# Altium PCB USB ISO.PcbDoc
Units mil, origin at the board's own origin, x right, y up, seen from the top; angles counter-clockwise.
Board outline 760 x 975 mil, 2 copper layers (Top Layer, Bottom Layer); 9 components, 27 nets, 54 pads, 12 vias.
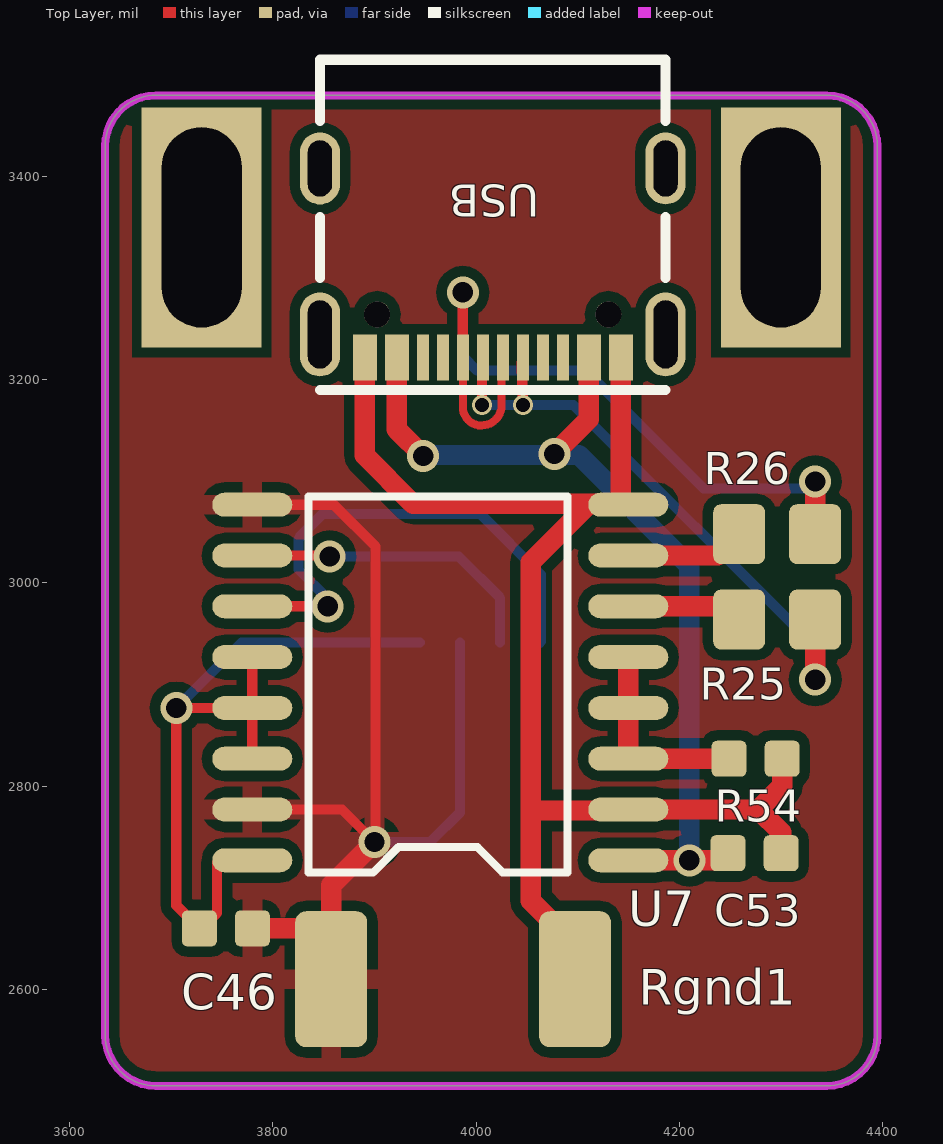
[diagram p0: Top Layer view]
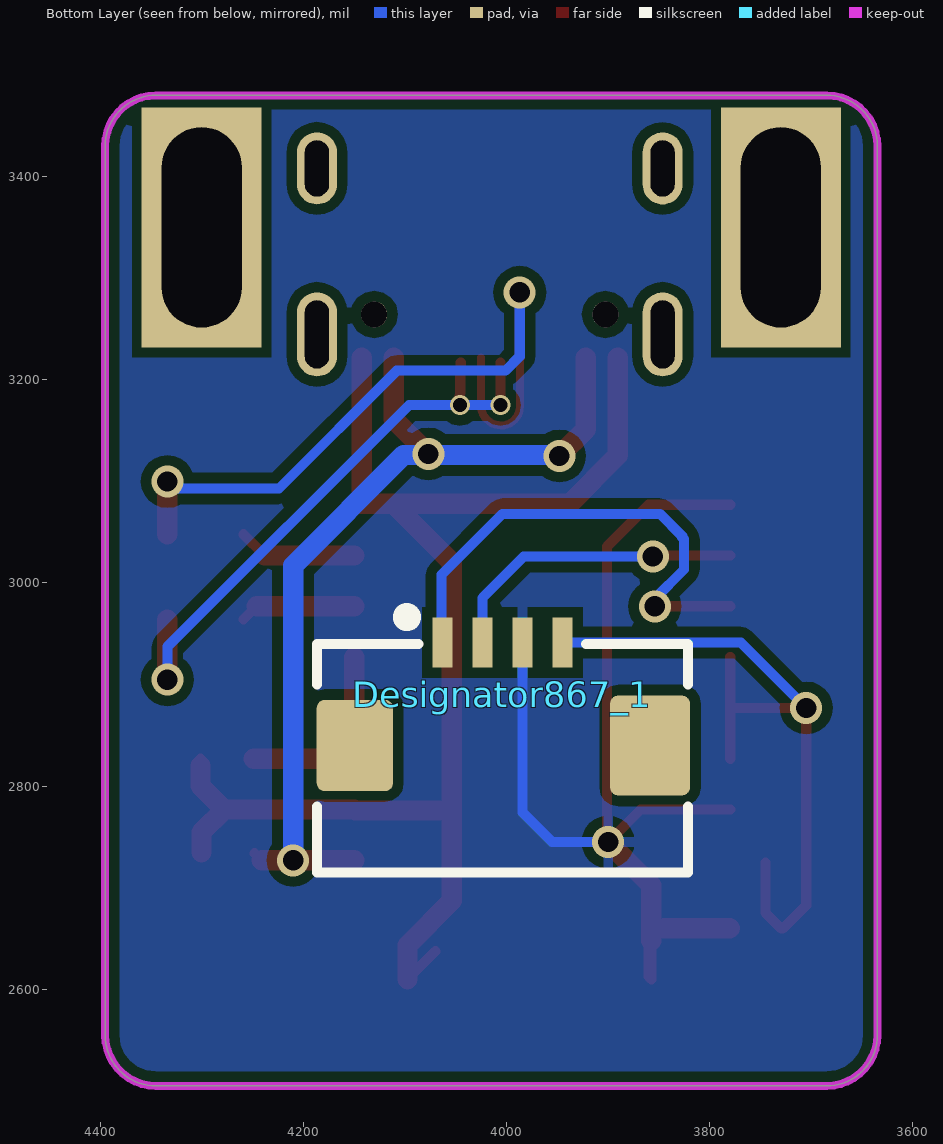
[diagram p1: Bottom Layer view, seen from below]
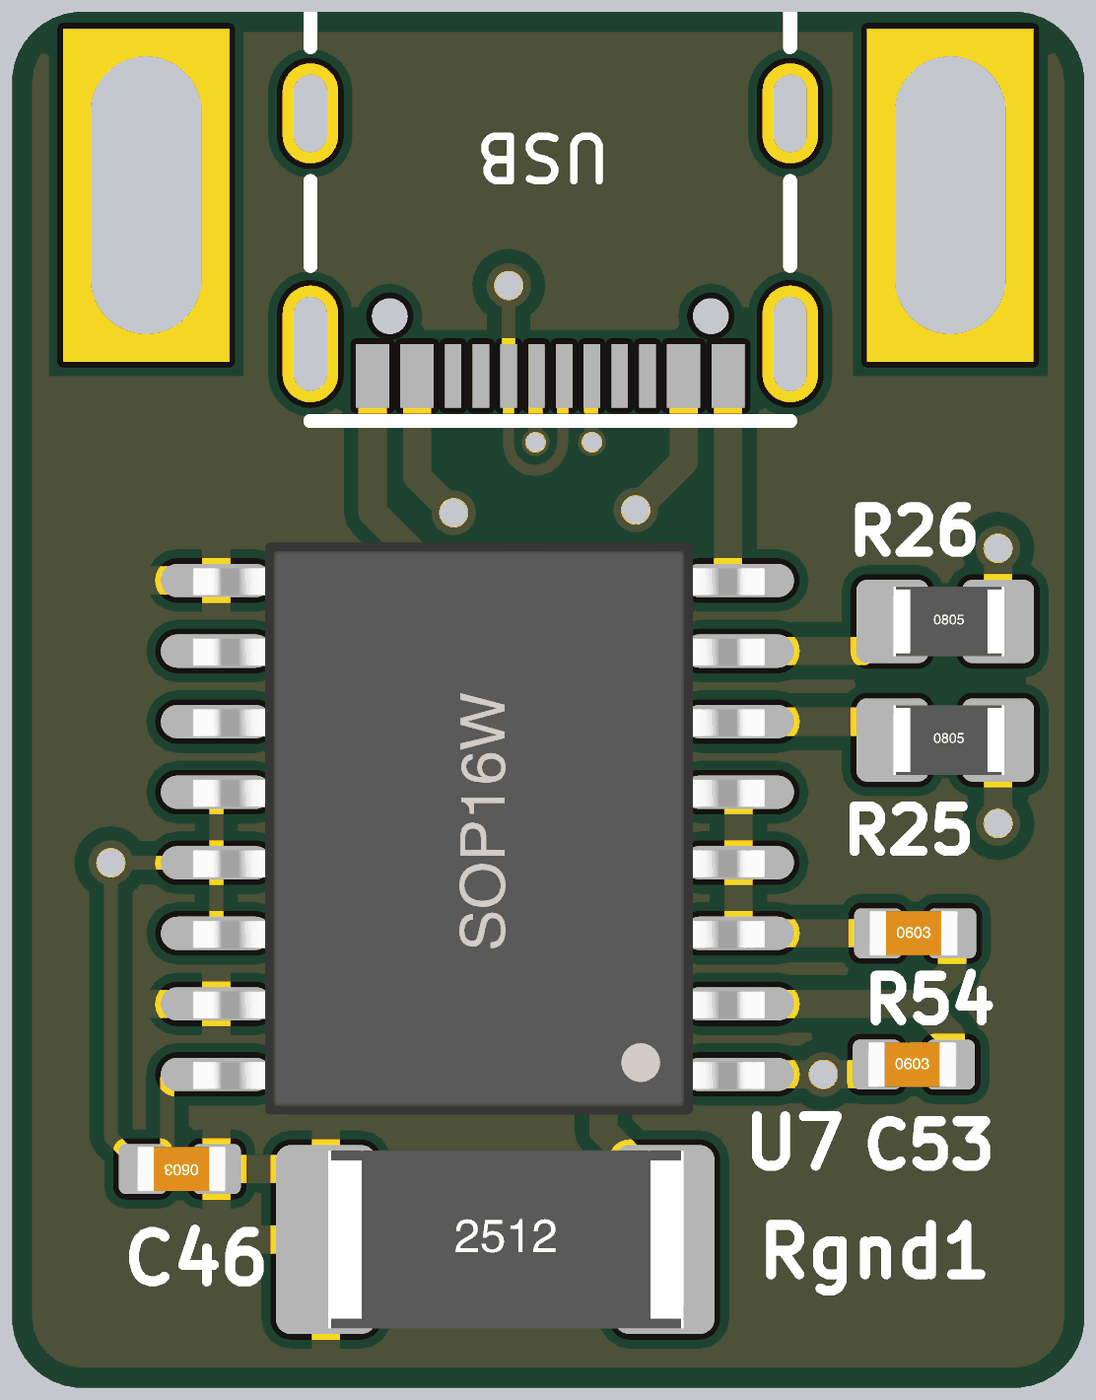
[diagram p2: 3D render of the assembled board from above, using the file's embedded part models]

## Layer stack, top to bottom
Top Solder: solder mask 0.4, Solder Resist, Dk 3.5
Top Layer: signal copper 1.4
Dielectric1: dielectric 12.6, FR-4, Dk 4.8
Bottom Layer: signal copper 1.4
Bottom Solder: solder mask 0.4, Solder Resist, Dk 3.5

## Board outline
3635,2555 ccw(c3685,2555) 3685,2505 4345,2505 ccw(c4345,2555) 4395,2555 4395,3430 ccw(c4345,3430) 4345,3480 3685,3480 ccw(c3685,3430) 3635,3430

## Design rules (kind name [scope] priority, off if disabled: settings)
Clearance [All] p1: gap=10 ignorepadtopadclearanceinfootprint=FALSE except(0: Arc-Hole Track-Hole SMDPad-Hole THPad-Hole Via-Hole Fill-Hole Poly-Hole Region-Hole Text-Hole)
PolygonConnect [All] p1: connectstyle=Relief reliefconductorwidth=20 reliefentries=4 polygonreliefangle="90 Angle" airgapwidth=10
RoutingVias [All] p1: holewidth=28 width=50 viastyle="Through Hole" minholewidth=28 minwidth=50 maxholewidth=28 maxwidth=50
SilkToSolderMaskClearance SilkscreenOverComponentPads [IsPad] p1: minsilkscreentomaskgap=10 clearancetoexposedcopper=TRUE
SolderMaskExpansion [All] p1: expansion=4 istentingtop=FALSE
Width [All] p1: maxlimit=50 minlimit=10 preferedwidth=10
29 further rules are at their usual default settings.

## Components (designator, comment, footprint, x,y, rotation, side; value= is the part's Value field where it differs from the comment)
C46 "Comment" "C 0603" 3745,2660 r180 top
C53 "Comment" "C 0603" 4283,2734 r0 top
Designator867_1 "Comment" FPC1.0-2H-WS-4P 4004,2840 r180 bottom
R25 "Comment" "R 0805" 4304,2964 r0 top
R26 "Comment" "R 0805" 4304,3048 r0 top
R54 "Comment" "C 0603" 4284,2827 r0 top
Rgnd1 "Comment" "R 2512" 3985,2610 r0 top
U7 "Comment" SOP16W_M 3952,2902 r180 top
USB "Comment" USB 4015,3325 r180 top

## Footprints (in the part's own frame and the unit in brackets; to place one, negate y for a bottom-side part, rotate by r counter-clockwise, add the part's x,y. Pads: shape width x height; smd on the part's side, far side on the other; paste and mask are expansions set on the pad)
"C 0603" [mm]
  rrect30% 0.87x0.9 smd: 1(-0.889,0) 2(0.439,0)
  body extent -1.05,-0.41 0.55,0.41, height 0.81
FPC1.0-2H-WS-4P [mm]
  rrect20% 1.905x2.286 smd: 0(-3.69,0)
  rrect20% 2x2.5 smd: 0(3.69,0)
  rect 0.5x1.25 smd: 1(-1.5,2.575) 2(-0.5,2.575) 3(0.5,2.575) 4(1.5,2.575)
  silkscreen extent -4.64,-3.18 4.64,3.31, body extent -4.45,-3.15 4.45,2.85, height 2
"R 0805" [mm]
  rrect30% 1.3x1.5 smd: 1(-1.143,0) 2(0.757,0)
  body extent -1.13,-0.62 0.87,0.63, height 0.5
"R 2512" [mm]
  rrect30% 1.8x3.4 smd: 1(-3.24,0) 2(2.856,0)
  body extent -3.2,-1.6 3.2,1.6, height 0.55
SOP16W_M [mm]
  oval 2x0.6 smd: 1(-5.025,4.445) 2(-5.025,3.175) 3(-5.025,1.905) 4(-5.025,0.635) 5(-5.025,-0.635) 6(-5.025,-1.905) 7(-5.025,-3.175) 8(-5.025,-4.445) 9(4.375,-4.445) 10(4.375,-3.175) 11(4.375,-1.905) 12(4.375,-0.635) 13(4.375,0.635) 14(4.375,1.905) 15(4.375,3.175) 16(4.375,4.445)
  body extent -5.51,-5.13 4.8,5.17, height 2.7
USB [mm]
  oval 1x2.1 hole 0.6 slot 1.7 at 90 deg: 1(-4.357,2.041) 2(4.283,2.042)
  oval 1x1.8 hole 0.6 slot 1.4 at 90 deg: 3(-4.357,-2.108) 4(4.283,-2.108)
  rect 0.6x1.15 smd: A1B12(-3.237,2.617) A4B9(-2.437,2.617) B1A12(3.163,2.617) B4A9(2.363,2.617)
  rect 0.3x1.15 smd: A5(-1.287,2.617) A6(-0.287,2.617) A7(0.213,2.617) A8(-1.787,2.617) B5(1.713,2.617) B6(0.713,2.617) B7(-0.787,2.617) B8(1.213,2.617)
  round 0.65 hole 0.65 unplated: ""(-2.927,1.542) ""(2.853,1.542)
  silkscreen extent -4.36,-4.83 4.28,3.43, body extent -4.61,-4.97 4.64,4.13, height 3.35

## Free pads (board coordinates)
  rect 118.11x236.22 hole 78.74 slot 196.85 at 90 deg: 2(3730,3350) 2(4300,3350)

## Via types
v1: diameter 31.5, hole 20, Top Layer to Bottom Layer, tented both sides, 10 vias
v2: diameter 19.68, hole 13.78, Top Layer to Bottom Layer, tented both sides, 2 vias

## Nets (pads, with @x,y where several pads share a name; then routed paths per layer and width w, separated by ;. In a path a pad name is that pad's centre, name@x,y a point inside that pad or via, vN(x,y) a via of type N, cw(c..) or ccw(c..) an arc to the next point about the centre after c; other vN are vias at no path point)
3.3V: 
$Net0: C46.1 Designator867_1.3 Rgnd1.1 U7.9 U7.15 | length 1117.5
  Top Layer w10: U7.15 3868,2777 v1(3900,2745) ; U7.9 3860,3077 3901,3036 v1@3901,2745 ; Rgnd1.1@3845,2660 3857.44,2647.56 Rgnd1.1 3860,2612.56 Rgnd1.1@3860,2665
  Top Layer w20: C46.1 Rgnd1.1@3845,2660 ; Rgnd1.1@3857.44,2647.56 3857.44,2702.44 v1(3900,2745)
  Bottom Layer w10: v1(3900,2745) 3955,2745 3984.32,2774.32 Designator867_1.3
$Net15: C46.2 Designator867_1.4 U7.12 U7.13 U7.14 U7.16 | length 741.3
  Top Layer w10: U7.16@3745,2725 3745,2675 3730,2660 C46.2 3705,2682.72 v1(3705,2877) U7.13 ; U7.14 U7.13 ; U7.12 U7.13
  Bottom Layer w10: v1(3705,2877) 3769.38,2941.38 Designator867_1.4
$Net29: C53.2 R54.2 Rgnd1.2 U7.2 U7.8 USB.A1B12 USB.B1A12 | length 1410
  Top Layer w10: Rgnd1.2@4070,2637.44 Rgnd1.2 ; U7.8@4142.44,3084.39 ccw(c4149.83,3084.39) 4146.12,3078 ccw(c4149.83,3084.39) U7.8 ; C53.2 C53.2@4300.28,2734.77 ; R54.2@4301.28,2820.23 R54.2
  Top Layer w20: USB.B1A12 3890.47,3125.47 3937.95,3078 U7.8@4111.44,3078 ; Rgnd1.2 4097.44,2643.56 4054,2687 4054,2776 ; U7.8@4142.44,3084.39 USB.A1B12 ; U7.8 4148.83,3078 4146.12,3078 U7.8@4111.44,3078 ; C53.2@4300.28,2734.77 4300.28,2754.72 4278,2777 ; R54.2@4301.28,2820.23 4301.28,2800.28 4278,2777 ; 4054,2776 4054,3020.56 U7.8@4111.44,3078 ; 4054,2776 4148.83,2776 U7.2 4278,2777
$Net30: R26.2 USB.A6 USB.B6 | length 738.2
  Top Layer w7.87: USB.B6 3986.93,3173.28 ccw(c4005.23,3173.28) 4005.23,3154.97 ccw(c4005.23,3174.97) 4025.23,3174.97 USB.A6@4025.23,3221.99
  Top Layer w10: USB.B6 3986.93,3285.93 v1(3987,3286)
  Top Layer w20: R26.2 v1(4333.81,3099.81)
  Bottom Layer w10: v1(3987,3286) 3987,3223 4001,3209 4108,3209 4224,3093 4327,3093 v1(4333.81,3099.81)
$Net31: C53.1 U7.1 USB.A4B9 USB.B4A9 | length 913.2
  Top Layer w10: C53.1@4241,2727 C53.1
  Top Layer w20: USB.B4A9 3921.97,3151.03 v1(3948,3125) ; v1(4077,3127) 4110.95,3160.95 USB.A4B9 ; U7.1 C53.1@4241,2727
  Bottom Layer w20: v1@3949.97,3126 4101.16,3126 4210,3017.16 v1(4210,2727)
$Net32: R25.2 USB.A7 USB.B7 | length 602.5
  Top Layer w10: v2(4006,3175) USB.A7@4006,3217.01 ; USB.B7@4045,3217.01 v2(4046,3175)
  Top Layer w20: v1@4333,2904 v1(4333.81,2904.81) R25.2
  Bottom Layer w10: v2@4006.62,3175 v2(4046,3175) 4096,3175 4333.81,2937.19 v1(4333.81,2904.81)
$Net123: R25.1 U7.6 | length 114.6
  Top Layer w10: R25.1@4246.01,2977 R25.1
  Top Layer w20: U7.6 R25.1@4246.01,2977
$Net124: R26.1 U7.7 | length 117.9
  Top Layer w10: R26.1@4238.01,3027 R26.1
  Top Layer w20: U7.7 R26.1@4238.01,3027
$Net156: R54.1 U7.3 U7.4 U7.5 | length 199.2
  Top Layer w20: U7.5 U7.4 U7.3 R54.1
$Net157: Designator867_1.1 U7.11 | length 495.3
  Top Layer w10: U7.11 v1(3854,2977)
  Bottom Layer w10: v1(3854,2977) 3854,2984.52 3825.25,3013.26 3825.25,3043.24 3827,3044.99 3827,3046 3849,3068 4004,3068 4064,3008 4064,2942.32 Designator867_1.1 Designator867_1.1@4062,2940.32
$Net158: Designator867_1.2 U7.10 | length 305.1
  Top Layer w10: U7.10 3855,3027 v1(3856,3026)
  Bottom Layer w10: v1(3856,3026) 3983,3026 4023.69,2985.31 Designator867_1.2
GND: 
NewNet1: 
NewNet1A: 
NewNet2: 
NewNet2A: 
NewNet3: 
NewNet3A: 
NewNet4: 
NewNet4A: 
NewNet5: 
NewNet5A: 
NewNet6: 
NewNet6A: 
NewNet7: 
NewNet7A: 
pads on no net: Designator867_1.0 USB. USB.1 USB.2 USB.3 USB.4 USB.A5 USB.A8 USB.B5 USB.B8

## Polygon pours and split planes (outlines as drawn)
$Net0 on Bottom Layer "Top Layer-No Net" (solid, remove dead copper, pour order 8): 3635,2555 ccw(c3685,2555) 3685,2505 4345,2505 ccw(c4345,2555) 4395,2555 4395,3430 ccw(c4345,3430) 4345,3480 3685,3480 ccw(c3685,3430) 3635,3430
$Net0 on Top Layer "Top Layer-No Net1" (solid, remove dead copper, pour order 11): 3635,2555 ccw(c3685,2555) 3685,2505 4345,2505 ccw(c4345,2555) 4395,2555 4395,3430 ccw(c4345,3430) 4345,3480 3685,3480 ccw(c3685,3430) 3635,3430

## Keep-outs
Keep-Out Layer:
  lines w7.87: 3635,2555 ccw(c3685,2555) 3685,2505 4065,2505 4345,2505 ccw(c4345,2555) 4395,2555 4395,2740 4395,3125 4395,3430 ccw(c4345,3430) 4345,3480 3685,3480 ccw(c3685,3430) 3635,3430 3635,3125 3635,2730 3635,2555

## Silkscreen, mask and mechanical layers (free items; w line width, h text height)
Top Overlay:
  lines w7.87: 3840,3085 4090,3085 4090,3065 4090,2715 4026.25,2715 4001.25,2740 3923.75,2740 3898.75,2715 3835,2715 3835,3085 3850,3085